# Altium PCB SHDN-BSPD-B01-V00.PcbDoc
Units mm, origin at the board's own origin, x right, y up, seen from the top; angles counter-clockwise.
Board outline 60 x 60 mm, 2 copper layers (Top Layer, Bottom Layer); 77 components, 36 nets, 230 pads, 46 vias.
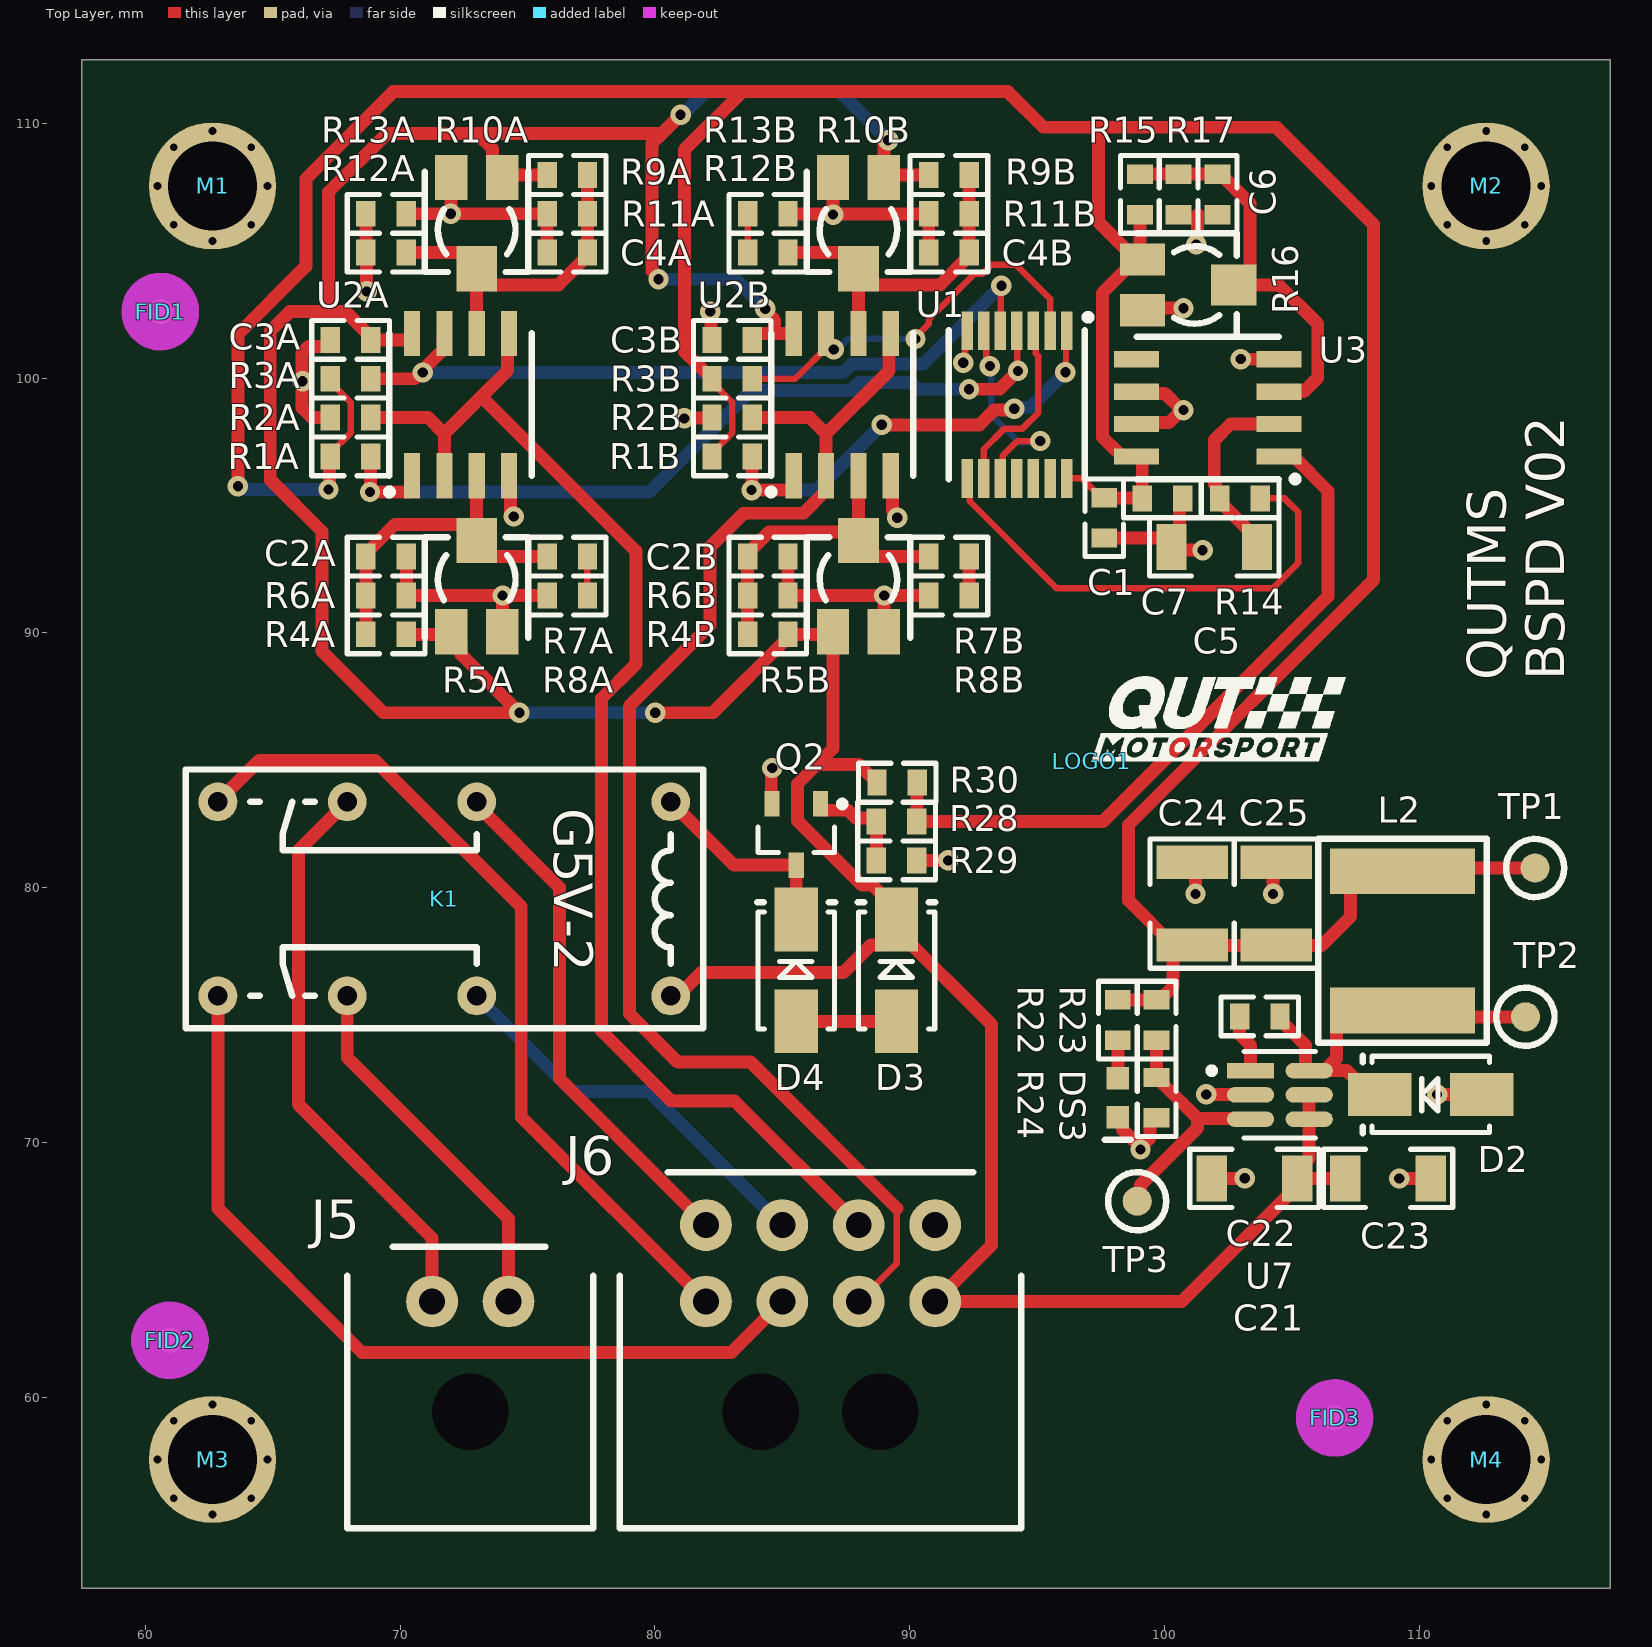
[diagram p0: Top Layer view]
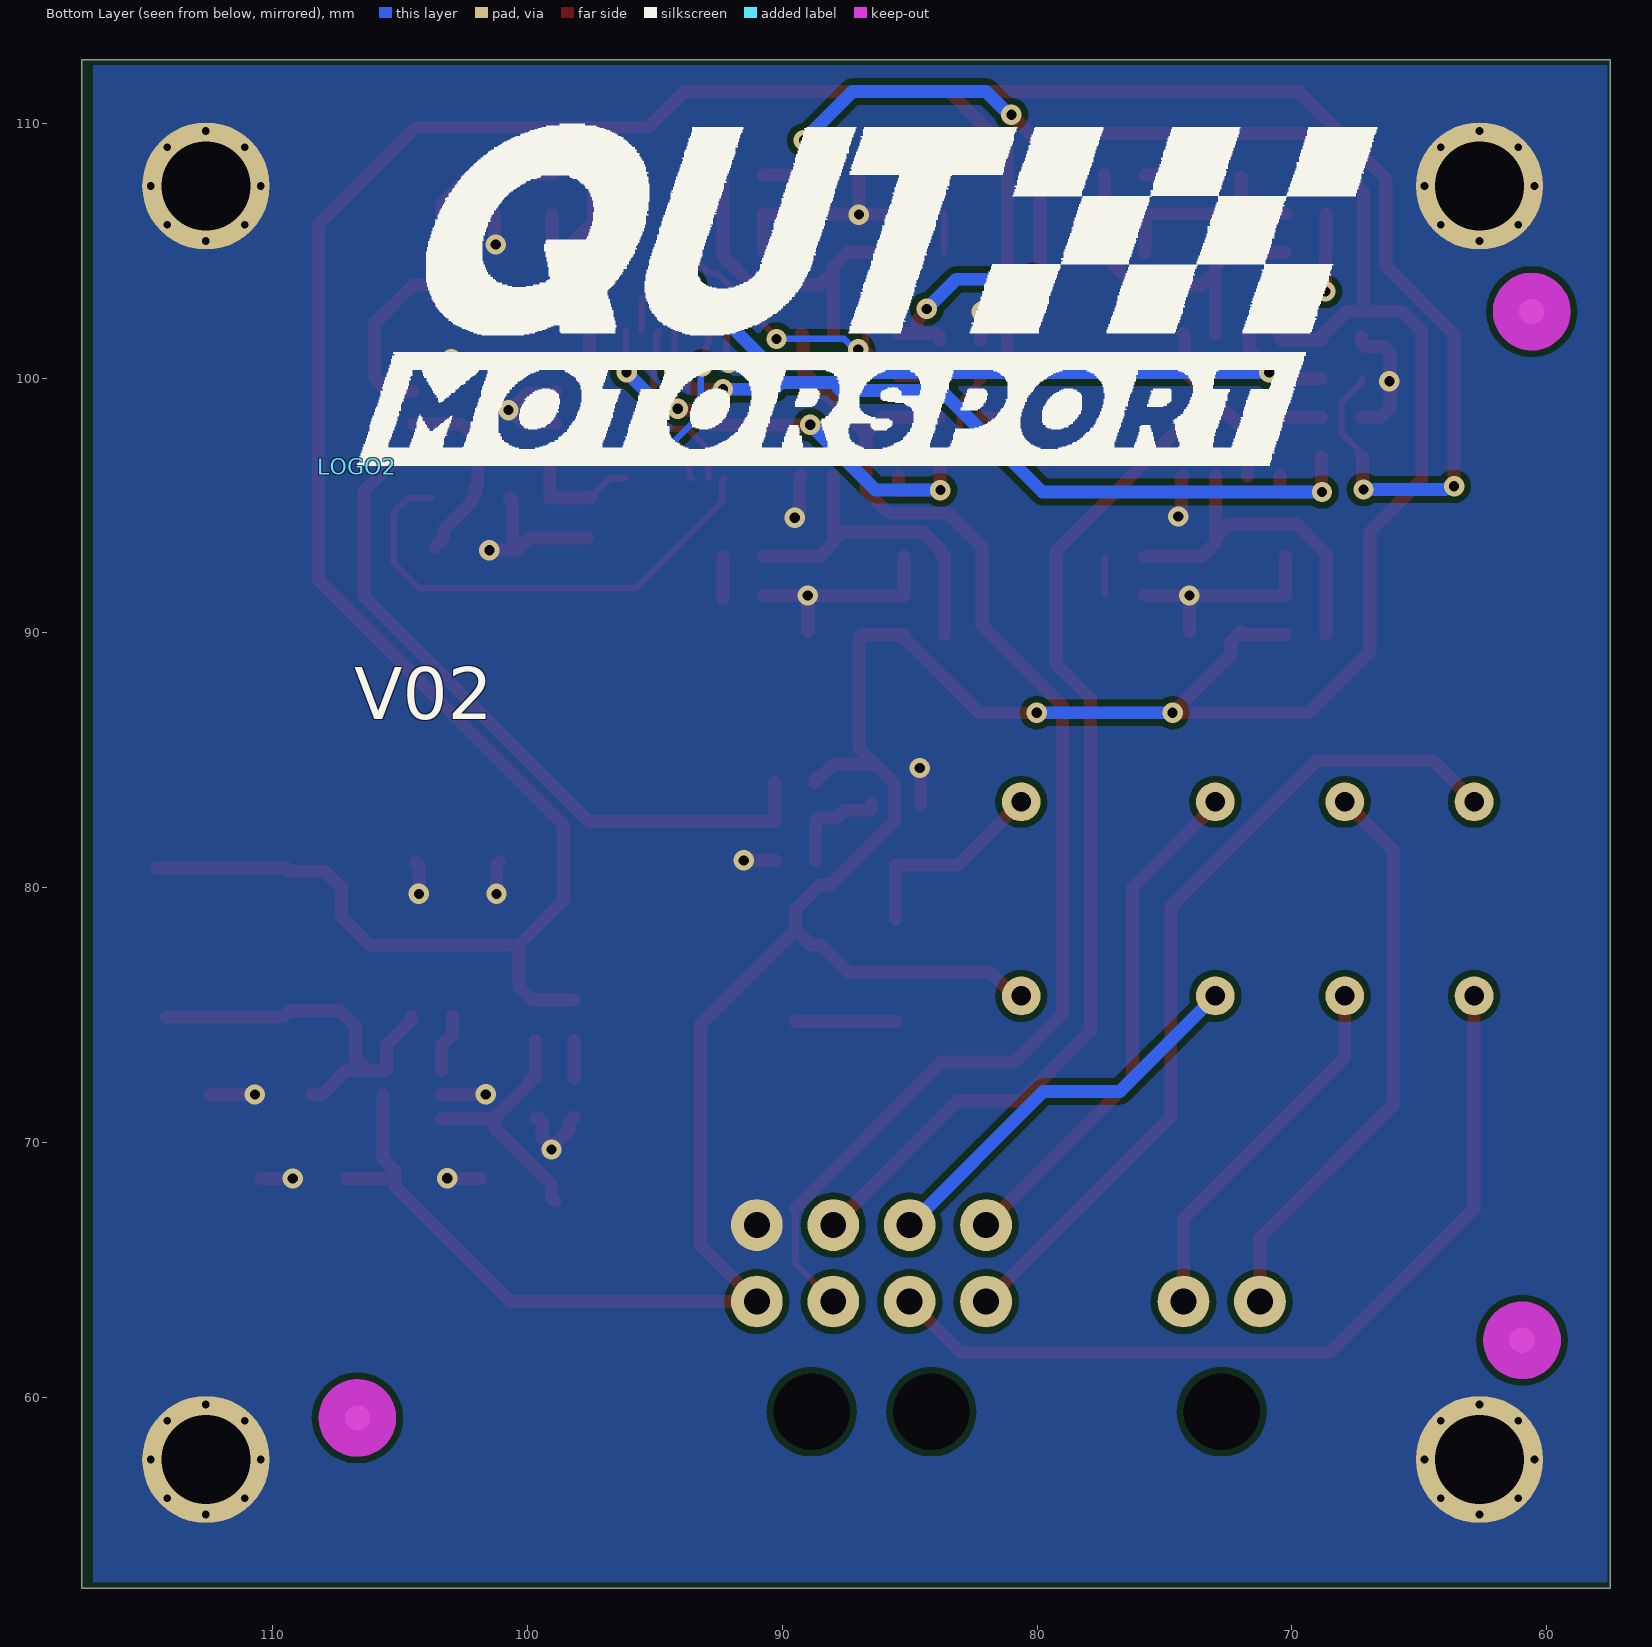
[diagram p1: Bottom Layer view, seen from below]
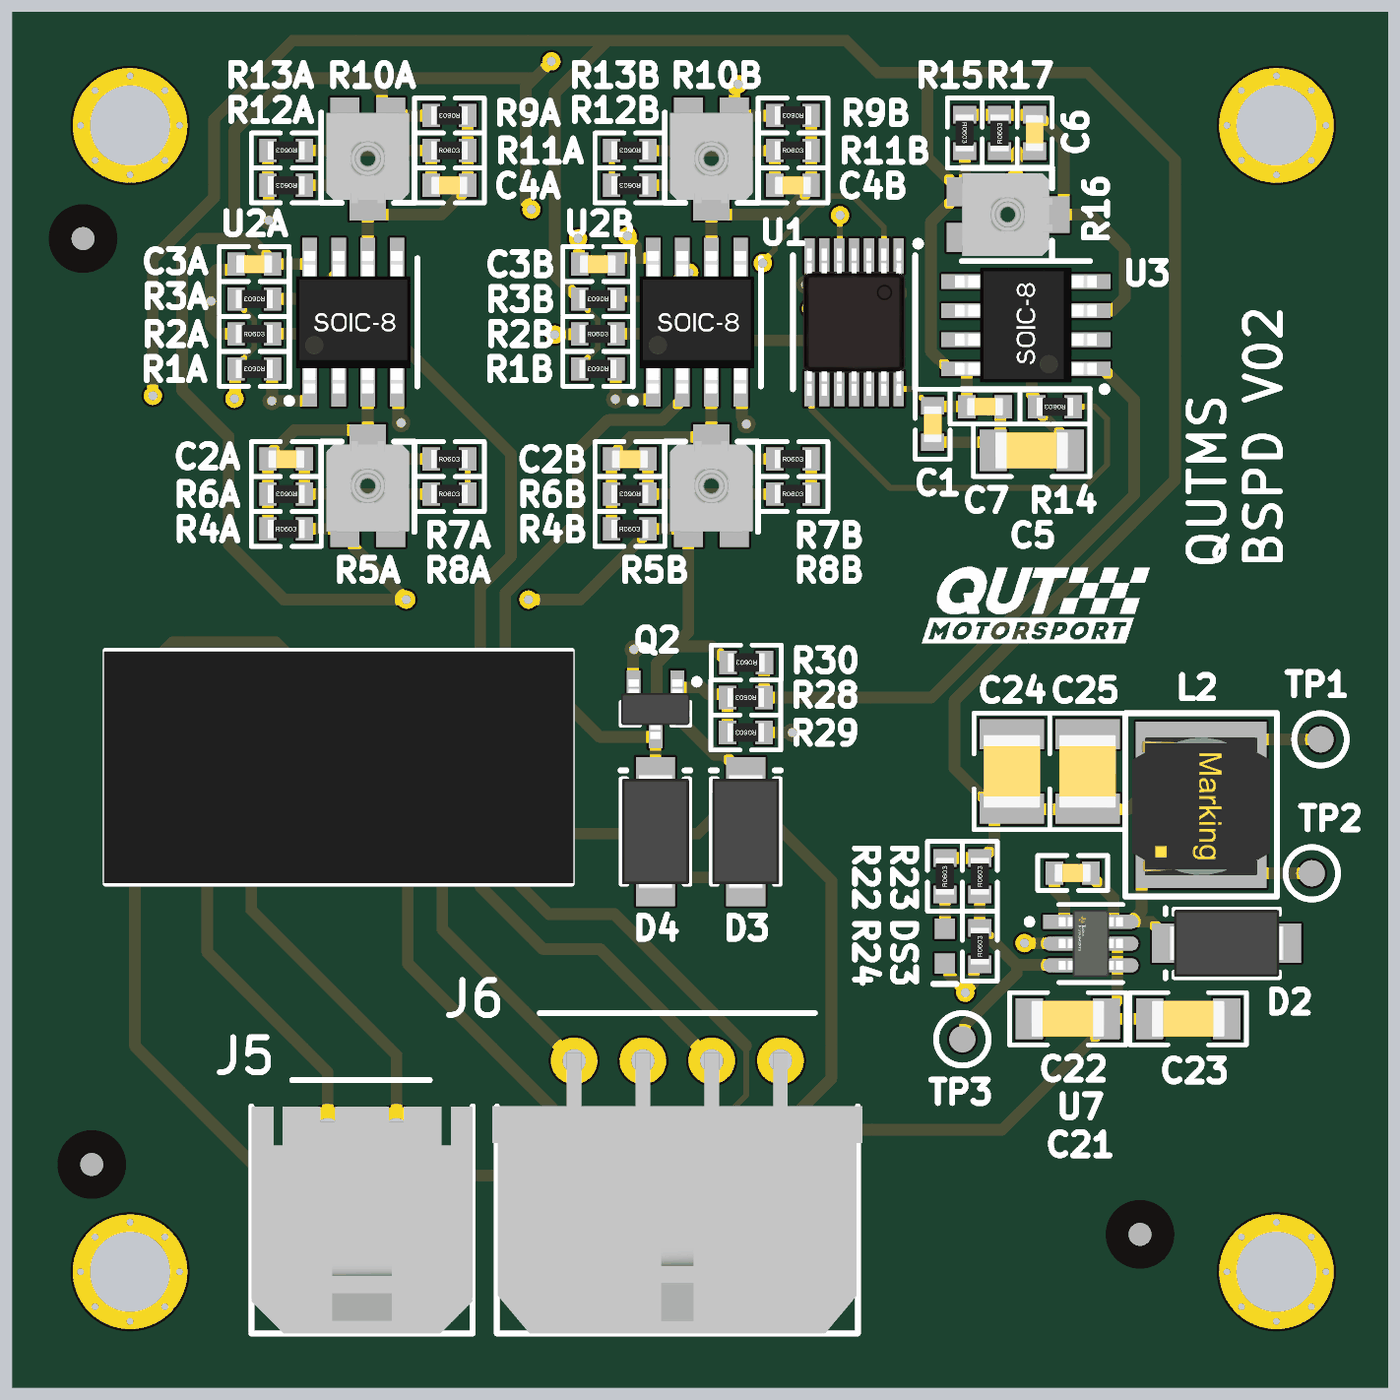
[diagram p2: 3D render of the assembled board from above, using the file's embedded part models]

## Layer stack, top to bottom
Top Solder: solder mask 0.0102, Solder Resist, Dk 3.5
Top Layer: signal copper 0.0356
Dielectric 1: dielectric 0.32, FR-4, Dk 4.8
Bottom Layer: signal copper 0.0356
Bottom Solder: solder mask 0.0102, Solder Resist, Dk 3.5

## Board outline
57.5,112.5 117.5,112.5 117.5,52.5 57.5,52.5

## Design rules (kind name [scope] priority, off if disabled: settings)
Clearance [All] p1: gap=0.254 ignorepadtopadclearanceinfootprint=FALSE except(0: Arc-Hole Track-Hole SMDPad-SMDPad SMDPad-Hole THPad-Hole Via-Hole Fill-Hole Poly-Hole Region-Hole Text-Hole; 0.203: Arc-Arc Arc-Track Arc-SMDPad Track-Track Track-SMDPad Fill-Fill Fill-Poly Fill-Region Poly-Poly Poly-Region Region-Region)
HoleSize [All] p1: absolutevalues=TRUE maxlimit=5.08 minlimit=0.025 maxpercent=80.000 minpercent=20.000
MinimumSolderMaskSliver [All] p1: minsoldermaskwidth=0.178
PolygonConnect [All] p1: connectstyle=Direct reliefconductorwidth=0.254 reliefentries=4 polygonreliefangle="90 Angle" airgapwidth=0.254
RoutingVias [All] p1: holewidth=0.4 width=0.8 viastyle="Through Hole" minholewidth=0.4 minwidth=0.8 maxholewidth=0.6 maxwidth=1.27
SilkToSilkClearance [All] p1: silktosilkclearance=0.127
SilkToSolderMaskClearance [IsPad] p1: minsilkscreentomaskgap=0.127 clearancetoexposedcopper=TRUE
SolderMaskExpansion [All] p1: expansion=0.102 istentingtop=FALSE
Width [All] p1: maxlimit=0.508 minlimit=0.254 preferedwidth=0.508 minimp=50.000000 maximp=50.000000 favimp=50.000000
26 further rules are at their usual default settings.

## Classes and differential pairs
component class SHDN-BSPD-S01-V00-BSPDBoard: FID1 FID2 FID3 LOGO1 LOGO2 M1 M2 M3 M4
channel class SHDN-BSPD-S03-V00-BSPDWindowComparitor: SHDN-BSPD-S03-V00-BSPDWindowComparitor1 SHDN-BSPD-S03-V00-BSPDWindowComparitor2
net class BSPD[1..11]: BSPD1 BSPD2 BSPD3 BSPD4 BSPD5 BSPD6 BSPD7 BSPD8 BSPD9 BSPD10 BSPD11
component class SHDN-BSPD-S10-V00-Connectivity: J5 J6
component class SHDN-BSPD-S09-V00-ShutdownRelay: D3 D4 K1 Q2 R28 R29 R30
component class SHDN-BSPD-S07-V00-PSU: C21 C22 C23 C24 C25 D2 DS3 L2 R22 R23 R24 TP1 TP2 TP3 U7
component class SHDN-BSPD-S04-V00-BSPDDelay: C5 C6 C7 R14 R15 R16 R17 U3
component class SHDN-BSPD-S03-V00-BSPDWindowComparitor2: C2B C3B C4B R1B R2B R3B R4B R5B R6B R7B R8B R9B R10B R11B R12B R13B U2B
component class SHDN-BSPD-S03-V00-BSPDWindowComparitor1: C2A C3A C4A R1A R2A R3A R4A R5A R6A R7A R8A R9A R10A R11A R12A R13A U2A
component class SHDN-BSPD-S02-V00-BSPDSystem: C1 U1

## Components (designator, comment, footprint, x,y, rotation, side; value= is the part's Value field where it differs from the comment)
C1 "100nF 50V 5% X7R 0603" Cap_Ceramic_0603 97.639,94.52 r90 top
C2A "100nF 50V 5% X7R 0603" Cap_Ceramic_0603 69.445,92.996 r180 top (schematic designator C2)
C2B "100nF 50V 5% X7R 0603" Cap_Ceramic_0603 84.431,92.996 r180 top (schematic designator C2)
C3A "100nF 50V 5% X7R 0603" Cap_Ceramic_0603 68.048,101.505 r180 top (schematic designator C3)
C3B "100nF 50V 5% X7R 0603" Cap_Ceramic_0603 83.034,101.505 r180 top (schematic designator C3)
C4A "100nF 50V 5% X7R 0603" Cap_Ceramic_0603 76.557,104.934 r0 top (schematic designator C4)
C4B "100nF 50V 5% X7R 0603" Cap_Ceramic_0603 91.543,104.934 r0 top (schematic designator C4)
C5 "10uF 25V 10% X7R 1206" Cap_Ceramic_1206 101.957,93.377 r0 top
C6 "100nF 50V 5% X7R 0603" Cap_Ceramic_0603 102.084,107.22 r90 top
C7 "100nF 50V 5% X7R 0603" Cap_Ceramic_0603 99.925,95.282 r180 top
C21 "100nF 100V 5% X7R 0603" Cap_Ceramic_0603 103.746,74.945 r0 top
C22 "22uF 35V 10% X7R 1206" Cap_Ceramic_1206 103.534,68.587 r0 top
C23 "22uF 35V 10% X7R 1206" Cap_Ceramic_1206 108.784,68.587 r180 top
C24 "47uF 16V 10% X7R 1210" Cap_Ceramic_1210 101.092,79.375 r270 top
C25 "47uF 16V 10% X7R 1210" Cap_Ceramic_1210 104.394,79.375 r270 top
D2 "B260A-13-F" SMA 110.458,71.882 r180 top
D3 "B260A-13-F" SMA 89.485,76.752 r90 top
D4 "SMAZ6V2-13-F" SMA 85.548,76.752 r90 top
DS3 "LED Green 0603" "LED GREEN 0603" 98.171,71.755 r270 top
FID1 "Fiducial 1MM" "FIDUCIAL 1MM" 60.579,102.616 r0 top
FID2 "Fiducial 1MM" "FIDUCIAL 1MM" 60.96,62.23 r0 top
FID3 "Fiducial 1MM" "FIDUCIAL 1MM" 106.68,59.182 r0 top
J5 "Microfit 3.0 1x2" Microfit_1X2_R_TH 72.75,59.432 r0 top
J6 "Microfit 3.0 2x4" Microfit_2X4_R_TH 86.5,59.432 r0 top
K1 "G5V-2-DC12" G5V-2 71.73,79.56 r180 top
L2 "74404064221" Inductor_6x6mm 109.347,77.851 r90 top
LOGO1 "10mm Wide QUTMS Logo" "QUTMS LOGO 10MM" 97.155,84.963 r0 top
LOGO2 "40mm Wide QUTMS Logo" "QUTMS LOGO 40MM" 106.68,96.52 r180 bottom
M1 "Hole M3 Loose Plated" "M3.5 PLATED" 62.63,107.55 r0 top
M2 "Hole M3 Loose Plated" "M3.5 PLATED" 112.63,107.55 r0 top
M3 "Hole M3 Loose Plated" "M3.5 PLATED" 62.63,57.55 r0 top
M4 "Hole M3 Loose Plated" "M3.5 PLATED" 112.63,57.55 r0 top
Q2 "2N7002" SOT23-3 85.548,82.086 r270 top
R1A "1k 5% 0603" Res_ThinFilm_0603 68.048,96.933 r180 top (schematic designator R1)
R1B "1k 5% 0603" Res_ThinFilm_0603 83.034,96.933 r180 top (schematic designator R1)
R2A "1k 5% 0603" Res_ThinFilm_0603 68.048,98.457 r0 top (schematic designator R2)
R2B "1k 5% 0603" Res_ThinFilm_0603 83.034,98.457 r0 top (schematic designator R2)
R3A "1k 5% 0603" Res_ThinFilm_0603 68.048,99.981 r180 top (schematic designator R3)
R3B "1k 5% 0603" Res_ThinFilm_0603 83.034,99.981 r180 top (schematic designator R3)
R4A "DNF 0603" Res_ThinFilm_0603 69.445,89.948 r0 top (schematic designator R4)
R4B "DNF 0603" Res_ThinFilm_0603 84.431,89.948 r0 top (schematic designator R4)
R5A "TC33X-2-103E" TC33 73.001,92.107 r0 top (schematic designator R5)
R5B "TC33X-2-103E" TC33 87.987,92.107 r0 top (schematic designator R5)
R6A "DNF 0603" Res_ThinFilm_0603 69.445,91.472 r180 top (schematic designator R6)
R6B "DNF 0603" Res_ThinFilm_0603 84.431,91.472 r180 top (schematic designator R6)
R7A "10k 5% 0603" Res_ThinFilm_0603 76.557,92.996 r0 top (schematic designator R7)
R7B "10k 5% 0603" Res_ThinFilm_0603 91.543,92.996 r0 top (schematic designator R7)
R8A "2k7 5% 0603" Res_ThinFilm_0603 76.557,91.472 r0 top (schematic designator R8)
R8B "2k7 5% 0603" Res_ThinFilm_0603 91.543,91.472 r0 top (schematic designator R8)
R9A "DNF 0603" Res_ThinFilm_0603 76.557,107.982 r180 top (schematic designator R9)
R9B "DNF 0603" Res_ThinFilm_0603 91.543,107.982 r180 top (schematic designator R9)
R10A "TC33X-2-103E" TC33 73.001,105.823 r180 top (schematic designator R10)
R10B "TC33X-2-103E" TC33 87.987,105.823 r180 top (schematic designator R10)
R11A "DNF 0603" Res_ThinFilm_0603 76.557,106.458 r0 top (schematic designator R11)
R11B "DNF 0603" Res_ThinFilm_0603 91.543,106.458 r0 top (schematic designator R11)
R12A "10k 5% 0603" Res_ThinFilm_0603 69.445,104.934 r180 top (schematic designator R12)
R12B "10k 5% 0603" Res_ThinFilm_0603 84.431,104.934 r180 top (schematic designator R12)
R13A "2k7 5% 0603" Res_ThinFilm_0603 69.445,106.458 r180 top (schematic designator R13)
R13B "2k7 5% 0603" Res_ThinFilm_0603 84.431,106.458 r180 top (schematic designator R13)
R14 "68k 5% 0603" Res_ThinFilm_0603 102.973,95.282 r180 top
R15 "DNF 0603" Res_ThinFilm_0603 99.036,107.22 r270 top
R16 "TC33X-2-103E" TC33 101.195,103.664 r270 top
R17 "DNF 0603" Res_ThinFilm_0603 100.56,107.22 r90 top
R22 "64k9 1% 0603" Res_ThinFilm_0603 99.695,74.803 r90 top
R23 "1k 5% 0603" Res_ThinFilm_0603 98.171,74.803 r90 top
R24 "19k6 1% 0603" Res_ThinFilm_0603 99.695,71.755 r90 top
R28 "100R 5% 0603" Res_ThinFilm_0603 89.485,82.594 r180 top
R29 "1k 5% 0603" Res_ThinFilm_0603 89.485,81.07 r180 top
R30 "750R 5% 0603" Res_ThinFilm_0603 89.511,84.124 r180 top
TP1 "TestPoint_SMD" TestPointSMD 114.554,80.772 r180 top
TP2 "TestPoint_SMD" TestPointSMD 114.173,74.93 r90 top
TP3 "TestPoint_SMD" TestPointSMD 98.933,67.691 r90 top
U1 "SN74HC08" TSSOP-14 94.21,98.965 r270 top
U2A "LM393 SOIC-8" SOIC-8 72.366,98.965 r90 top (schematic designator U2)
U2B "LM393 SOIC-8" SOIC-8 87.352,98.965 r90 top (schematic designator U2)
U3 "LM393" SOIC-8 101.703,98.838 r180 top
U7 "LMR14010" LMR14010 104.521,71.882 r0 top

## Footprints (in the part's own frame and the unit in brackets; to place one, negate y for a bottom-side part, rotate by r counter-clockwise, add the part's x,y. Pads: shape width x height; smd on the part's side, far side on the other; paste and mask are expansions set on the pad)
Cap_Ceramic_0603 [mil]
  rect 30x40 smd: 1(-31.24,0) 2(31.24,0)
  silkscreen extent -60,-30 60,30, body extent -31,-16 32,16, height 33
Cap_Ceramic_1206 [mil]
  rect 47x71 smd: 1(-66.08,0) 2(66.08,0)
  silkscreen extent -100,-45 100,45, body extent -63,-31 63,32, height 53
Cap_Ceramic_1210 [mm]
  rect 1.3x2.8 smd: 1(-1.625,0) 2(1.625,0)
  silkscreen extent -2.54,-1.65 2.54,1.65, body extent -1.6,-1.25 1.6,1.25, height 1.35
"FIDUCIAL 1MM" [mm]
  round 1 smd mask+1: 1(0,0)
  round 1 smd far side mask+1: 1(0,0)
  Keep-Out Layer circle w1.524: c0,0 r0.762
G5V-2 [mil]
  round 60 hole 30: 1(-350,150) 4(-50,150) 6(150,150) 8(350,150) 9(350,-150) 11(150,-150) 13(-50,-150) 16(-350,-150)
  silkscreen extent -400,-200 400,200, body extent -404,-199 404,199, height 453
Inductor_6x6mm [mm]
  rect 1.8x5.7 smd: 1(-2.667,0) 2(2.794,0)
  silkscreen extent -3.94,-3.3 4.06,3.3, body extent -3,-3 3,3, height 4.56
"LED GREEN 0603" [mil]
  rect 35x35 smd: 1(-30,0) 2(30,0)
  silkscreen extent 65,-20 65,20, body extent -40,-20 40,20, height 30
LMR14010 [mm]
  rect 1.854x0.612 smd: 1(-1.136,0.933)
  rrect100% 1.854x0.612 smd: 2(-1.136,-0.017) 3(-1.136,-0.967) 4(1.164,-0.967) 5(1.164,-0.017) 6(1.164,0.933)
  silkscreen extent -2.79,-1.72 1.41,1.68, body extent -2.56,-1.97 2.59,1.93, height 0.25
"M3.5 PLATED" [mil]
  round 20 hole 11.81: 1(-85,0) 1(-60,-60) 1(-60,60) 1(0,-85) 1(0,85) 1(60,-60) 1(60,60) 1(85,0)
  round 196.85 hole 137.8: 1(0,0)
Microfit_1X2_R_TH [mil]
  round 80 hole 40: 1(59.06,170) 2(-59.06,170)
  round 0 hole 118.11 mask+10: NC(0,0)
  silkscreen extent -190,-180 190,255, body extent -190,-180 190,210, height 223
Microfit_2X4_R_TH [mil]
  round 80 hole 40: 1(177.17,170) 2(59.06,170) 3(-59.06,170) 4(-177.17,170) 5(177.17,288.19) 6(59.06,288.19) 7(-59.06,288.19) 8(-177.17,288.19)
  round 0 hole 118.11 mask+10: NC(-92.52,0) NC(92.52,0)
  silkscreen extent -310,-180 310,370, body extent -318,-180 318,302, height 350
"QUTMS LOGO 10MM" [mm]
  silkscreen extent 0,0 9.96,3.34
"QUTMS LOGO 40MM" [mm]
  silkscreen extent -0.01,0.05 40.04,13.47
Res_ThinFilm_0603 [mil]
  rect 30x40 smd: 1(-31.24,0) 2(31.24,0)
  silkscreen extent -60,-30 60,30, body extent -31,-16 32,16, height 18
SMA [mm]
  rect 2.5x1.7 smd: A(-2,0) K(2,0)
  silkscreen extent -2.3,-1.52 2.67,1.52, body extent -2.52,-1.46 2.52,1.46, height 2.4
SOIC-8 [mil]
  rect 70x25 smd: 1(-110,75) 2(-110,25) 3(-110,-25) 4(-110,-75) 5(110,-75) 6(110,-25) 7(110,25) 8(110,75)
  silkscreen extent -140,-110 110,115, body extent -122,-98 122,98, height 75
SOT23-3 [mm] "SOT23, 3-Leads, Body 2.90x2.45mm, Pitch 0.95mm, IPC Medium Density"
  rect 1x0.6 smd: D(1.2,0) G(-1.2,0.95) S(-1.2,-0.95)
  silkscreen extent -1.32,-1.5 0.7,1.93, body extent -1.3,-1.5 1.3,1.5, height 1.1
TC33 [mil] "3 mm SMD Trimpot® Trimming Potentiometer"
  rect 50x70 smd: 1(-39.37,-81) 3(39.37,-81)
  rect 63x70 smd: 2(0,60)
  silkscreen extent -80,-90 80,65, body extent -71,-90 71,66, height 46
TestPointSMD [mil]
  round 45 smd: 1(0,0)
  silkscreen extent -45,-45 45,45
TSSOP-14 [mm]
  rect 1.524x0.45 smd: 1(-2.9,1.95) 2(-2.9,1.3) 3(-2.9,0.65) 4(-2.9,0) 5(-2.9,-0.65) 6(-2.9,-1.3) 7(-2.9,-1.95) 8(2.9,-1.95) 9(2.9,-1.3) 10(2.9,-0.65) 11(2.9,0) 12(2.9,0.65) 13(2.9,1.3) 14(2.9,1.95)
  silkscreen extent -3.56,-2.67 2.92,2.92, body extent -3.21,-2.22 3.22,2.23, height 1.11

## Part data
C1 C2A C2B C3A C3B C4A C4B C6 C7: "Capacitor, Ceramic, SMD, 100nF, 50V, 5%, X7R, 0603"
C5: "Capacitor, Ceramic, SMD, 10uF, 25V, 10%, X7R, 1206"
C21: "Capacitor, Ceramic, SMD, 100nF, 100V, 5%, X7R, 0603"
C22 C23: "Capacitor, Ceramic, SMD, 22uF, 35V, 10%, X7R, 1206"
C24 C25: "Capacitor, Ceramic, SMD, 47uF, 16V, 5%, X7R, 1210"
D2 D3: "Diode, Schottky Barrier Rectifier, 60 V, 2 A, B260A-13-F"
D4: "Zener Diode 6.2V 1W ±5% Surface Mount SMA", Manufacturer=Generic, MPN="5V6 500mW SMA"
J5: library part Microfit_1x2
J6: library part Microfit_2x4
K1: "General Purpose Relay DPDT (2 Form C) Through Hole, 12V, 2A"
L2: "FIXED IND 220UH 660MA 850 MOHM", ComponentLink1Description=Digikey, ComponentLink1URL=https://www.digikey.com.au/product-detail/en/w%C3%BCrth-elektronik/74404064221/732-7261-1-ND/5353241, ComponentLink2Description="LCSC A", ComponentLink2URL=https://lcsc.com/product-detail/Power-Inductors_Sunlord-SWPA6045S221MT_C91047.html, ComponentLink3Description="LCSC B", ComponentLink3URL=https://lcsc.com/product-detail/Power-Inductors_SXN-Shun-Xiang-Nuo-Elec-SMNR6045-221MT_C467145.html
LOGO1: library part "QUTMS Logo 10mm"
LOGO2: library part "QUTMS Logo 40mm"
M1 M2 M3 M4: "M3.5 Hole, Plated"
R1A R1B R2A R2B R3A R3B R23 R29: "Resistor, SMD, 1k, 0.1W, 5%, 0603"
R4A R4B R6A R6B R9A R9B R11A R11B R15 R17: "Resistor, SMD, DNF, 0.1W, 0603"
R5A R5B R10A R10B R16: "10 kOhms 0.1W, 1/10W J Lead Surface Mount Trimmer Potentiometer Cermet 1 Turn Top Adjustment"
R7A R7B R12A R12B: "Resistor, SMD, 10k, 0.1W, 5%, 0603"
R8A R8B R13A R13B: "Resistor, SMD, 2k7, 0.1W, 5%, 0603"
R14: "Resistor, SMD, 68k, 0.1W, 5%, 0603"
R22: "Resistor, SMD, 64k9, 0.1W, 5%, 0603"
R24: "Resistor, SMD, 19k6, 0.1W, 5%, 0603"
R28: library part "100R 5%, 0603", "Resistor, SMD, 100R, 0.1W, 5%, 0603"
R30: library part "820R 5% 0603", "Resistor, SMD, 750R, 0.1W, 5%, 0603"
U1: "Quadruple 2-Input Positive-AND Gates"
U2A U2B: library part LM393, "General Purpose Comparitor 2 Circuit 8-SOIC"
U3: "General Purpose Comparitor 2 Circuit 8-SOIC"

## Via types
v1: diameter 0.8, hole 0.4, Top Layer to Bottom Layer, 28 vias
v2: diameter 0.8, hole 0.4, Top Layer to Bottom Layer, tented both sides, 18 vias

## Nets (pads, with @x,y where several pads share a name; then routed paths per layer and width w, separated by ;. In a path a pad name is that pad's centre, name@x,y a point inside that pad or via, vN(x,y) a via of type N, cw(c..) or ccw(c..) an arc to the next point about the centre after c; other vN are vias at no path point)
3V3: C1.2 C7.2 C24.2 C25.2 L2.2 R1A.2 R1B.2 R3A.2 R3B.2 R15.2 R16.1 R22.2 R23.2 TP1.1 U1.14 U3.8 | length 159.2
  Top Layer w0.254: R1A.2 67.255,97.06 68.048,97.853 68.048,99.061 67.255,99.854 R3A.2 ; R1B.2 82.241,97.06 83.034,97.853 83.034,99.061 82.241,99.854 R3B.2 ; U1.14 96.766,96.065 97.258,95.573 97.258,95.567 C1.2@97.512,95.313
  Top Layer w0.508: v1(63.627,95.758) 63.627,101.727 66.294,104.394 66.294,107.823 69.723,111.252 83.439,111.252 ; v1(67.183,95.631) 67.219,95.667 67.219,96.897 R1A.2 ; R1B.2@82.114,96.806 R1B.2 ; R3B.2 82.241,100.108 82.114,100.235 81.987,100.235 81.682,100.54 81.67,100.54 81.153,101.057 81.153,108.966 83.439,111.252 ; C1.2@97.512,95.313 C1.2 97.655,95.298 99.116,95.298 C7.2 99.132,96.869 99.068,96.933 U3.8 98.337,96.933 97.915,97.356 97.903,97.356 97.563,97.696 97.563,103.343 98.985,104.766 99.036,104.766 R16.1@99.036,105.029 ; R23.2 R22.2 99.822,75.596 100.33,76.104 C24.2@100.33,77.75 ; R15.2 R16.1@99.036,105.029 ; TP1.1 109.474,80.772 L2.2 107.961,80.645 107.315,79.999 107.315,78.867 106.172,77.724 104.394,77.724 101.118,77.724 C24.2 100.342,77.75 98.59,79.502 98.59,82.461 108.204,92.075 108.204,106.045 104.394,109.855 97.707,109.855 ; 83.439,111.252 93.853,111.252 95.25,109.855 97.707,109.855 ; 97.707,109.855 97.409,109.557 97.409,106.139 98.519,105.029 R16.1@99.036,105.029
  Bottom Layer w0.508: v1(63.627,95.758) 63.683,95.702 63.889,95.702 63.96,95.631 v1(67.183,95.631)
"5KW SIGNAL IN": J6.6 R2A.2 U2A.2 U2A.5 | length 51.1
  Top Layer w0.508: R2A.2 71.096,98.457 71.731,97.822 ; U2A.2 71.731,97.822 ; U2A.5 74.207,101.695 74.207,100.298 73.124,99.215 ; J6.6 83.124,71.628 80.645,71.628 77.902,74.371 77.902,87.427 79.248,88.773 79.248,93.218 73.251,99.215 73.124,99.215 ; 71.731,97.822 73.124,99.215
12V: C3A.1 C3B.1 C22.2 C23.2 D3.K J6.1 K1.1 R4A.2 R4B.2 R5A.1 R5B.1 R9A.2 R9B.2 R10A.1 R10B.1 R30.2 U2A.8 U2B.8 U7.4 U7.5 | length 163.9
  Top Layer w0.508: R4A.2 71.899,89.948 R5A.1 72.382,89.669 72.382,89.162 v1(74.676,86.868) 69.342,86.868 66.929,89.281 66.929,93.98 64.897,96.012 64.897,101.854 65.659,102.616 67.183,102.616 ; U2A.8 70.461,101.568 70.397,101.505 C3A.1 68.841,101.632 67.857,102.616 67.183,102.616 ; R9A.2 74.103,107.982 R10A.1 73.62,108.261 73.62,109.006 73.025,109.601 ; v1(80.01,86.868) 82.271,86.868 85.224,89.821 R4B.2 86.885,89.948 86.987,89.846 86.987,85.463 86.36,84.836 ; v1(80.137,103.886) 80.137,103.965 79.883,104.219 79.883,109.22 80.264,109.601 ; K1.1 80.895,75.75 81.808,76.663 87.396,76.663 88.489,77.756 88.889,77.756 D3.K@89.485,78.352 ; v1(81.007,110.344) 80.264,109.601 ; C3B.1 83.827,101.632 83.954,101.759 84.701,101.759 ; v1(84.328,102.724) 84.328,102.645 84.701,102.272 84.701,101.759 ; U2B.8 84.701,101.759 ; R30.2 88.718,84.251 88.591,84.378 88.464,84.378 88.006,84.836 86.36,84.836 ; v1(89.154,109.347) 88.987,109.18 R10B.1 89.089,107.982 R9B.2 ; U7.5 U7.4 105.685,69.365 105.212,68.892 C22.2 ; C23.2 C22.2 ; 67.183,102.616 67.183,107.315 69.469,109.601 73.025,109.601 ; 73.025,109.601 74.549,109.601 80.264,109.601 ; 86.36,84.836 85.598,84.074 85.598,82.628 88.121,80.105 88.532,80.105 89.485,79.152 D3.K D3.K@89.485,78.352 ; D3.K@89.485,78.352 93.218,74.619 93.218,65.968 J6.1 100.68,63.75 105.212,68.282 C22.2
  Bottom Layer w0.508: v1(74.676,86.868) v1(80.01,86.868) ; v1(80.137,103.886) 83.166,103.886 v1(84.328,102.724) ; v1(81.007,110.344) 81.086,110.344 81.994,111.252 87.249,111.252 v1(89.154,109.347)
BSPD1: R1B.1 U1.1 U2B.1 | length 19.5
  Top Layer w0.254: v2(96.115,100.235) 96.138,100.258 96.138,101.843 U1.1
  Top Layer w0.508: v2(83.796,95.607) 85.439,95.607 85.447,95.599 U2B.1 ; v2@83.812,95.552 83.812,96.917 R1B.1 ; v1(88.9,98.171) 92.739,98.171 93.319,98.75 94.051,98.75 v1(94.107,98.806)
  Bottom Layer w0.508: v2(83.796,95.607) 86.336,95.607 v1(88.9,98.171) ; v1(94.107,98.806) 94.163,98.862 94.742,98.862 v2(96.115,100.235)
BSPD2: R3B.1 U1.2 U2B.7 | length 16.1
  Top Layer w0.254: R3B.1 85.51,99.981 85.606,100.076 U2B.7@86.717,101.187 ; U2B.7 U2B.7@86.717,101.187 ; v1(87.015,101.132) 86.96,101.187 U2B.7@86.717,101.187 ; v1(90.229,101.542) 90.229,101.606 90.749,102.126 90.749,102.306 92.539,104.096 92.854,104.096 93.223,104.465 94.163,104.465 95.51,103.118 U1.2
  Bottom Layer w0.254: v1(87.015,101.132) 87.163,101.132 87.573,101.542 v1(90.229,101.542)
BSPD3: R7B.2 R8B.2 | length 1.7
  Top Layer w0.508: R8B.2@92.336,91.345 R8B.2 R7B.2
BSPD4: R12B.2 R13B.2 | length 1.5
  Top Layer w0.254: R12B.2 R13B.2
BSPD5: R1A.1 U1.4 U2A.1 | length 32.9
  Top Layer w0.254: U1.4 94.231,101.844 94.231,100.309 v1(94.252,100.288)
  Top Layer w0.508: R1A.1 68.826,96.917 68.826,95.552 v2(68.81,95.536) 70.397,95.536 70.461,95.599 U2A.1 ; v1(92.329,99.568) 93.525,99.568 94.245,100.288 v1(94.252,100.288)
  Bottom Layer w0.508: v2(68.81,95.536) 79.788,95.536 83.765,99.513 87.686,99.513 88.014,99.841 90.035,99.841 90.308,99.568 v1(92.329,99.568)
BSPD6: R3A.1 U1.5 U2A.7 | length 29.9
  Top Layer w0.254: U1.5 93.58,101.885 93.58,103.613 v1(93.599,103.632)
  Top Layer w0.508: R3A.1 70.561,99.981 70.804,100.224 v1(70.883,100.224) ; v1@70.831,100.276 71.667,101.112 71.667,101.695 U2A.7
  Bottom Layer w0.508: v1(70.883,100.224) 87.392,100.224 87.719,100.552 90.523,100.552 93.599,103.628 v1(93.599,103.632)
BSPD7: R7A.2 R8A.2 | length 1.5
  Top Layer w0.254: R8A.2 R7A.2
BSPD8: R12A.2 R13A.2 | length 3.1
  Top Layer w0.508: R13A.2 R12A.2 68.667,104.918 68.667,103.426 v2(68.683,103.41)
BSPD9: R14.1 U1.8 | length 19.4
  Top Layer w0.254: U1.8 92.355,95.97 92.355,95.166 95.771,91.75 104.25,91.75 105.25,92.75 105.25,94.75 104.718,95.282 R14.1
BSPD10: R28.1 R30.1 U3.1 | length 28
  Top Layer w0.508: R30.1 90.291,84.111 90.291,82.607 R28.1 97.58,82.594 106.426,91.44 106.426,95.575 105.068,96.933 U3.1
BSPD11: C6.2 R15.1 R16.2 R17.2 U3.3 | length 16
  Top Layer w0.508: R15.1@99.02,107.998 R15.1 R17.2 C6.2 102.211,108.013 103.354,106.87 103.354,104.21 R16.2@102.808,103.664 ; R16.2 R16.2@102.808,103.664 ; U3.3 105.469,99.473 106.021,100.025 106.021,102.14 104.497,103.664 R16.2@102.808,103.664
"CHAIN IN": J6.7 K1.4 | length 15.7
  Bottom Layer w0.508: K1.4 76.75,72 79.752,72 J6.7
"CHAIN LED": J5.1 K1.6 | length 14.6
  Top Layer w0.508: K1.6 67.92,73.33 74.25,67 J5.1
"CHAIN OUT": J6.3 K1.8 | length 33.7
  Top Layer w0.508: K1.8 62.84,67.41 68.5,61.75 83,61.75 J6.3
"COMP BTMA": C4A.2 R9A.1 R10A.2 R11A.2 R12A.1 U2A.6 | length 13.8
  Top Layer w0.508: R12A.1 72.455,104.934 73.001,104.388 R10A.2 R10A.2@73.001,104.21 ; U2A.6 R10A.2@73.001,104.21 ; R9A.1 R11A.2 C4A.2 77.35,104.807 76.207,103.664 73.547,103.664 R10A.2@73.001,104.21
"COMP BTMB": C4B.2 R9B.1 R10B.2 R11B.2 R12B.1 U2B.6 | length 13.8
  Top Layer w0.508: R12B.1 87.441,104.934 87.987,104.388 R10B.2 R10B.2@87.987,104.21 ; U2B.6 R10B.2@87.987,104.21 ; R9B.1 R11B.2 C4B.2 92.336,104.807 91.193,103.664 88.533,103.664 R10B.2@87.987,104.21
"COMP TOPA": C2A.2 R4A.1 R5A.2 R6A.2 R7A.1 U2A.3 | length 13.8
  Top Layer w0.508: R4A.1 R6A.2 C2A.2 68.652,93.123 69.795,94.266 72.455,94.266 R5A.2@73.001,93.72 ; U2A.3 R5A.2@73.001,93.72 ; R7A.1 73.547,92.996 73.001,93.542 R5A.2 R5A.2@73.001,93.72
"COMP TOPB": C2B.2 R4B.1 R5B.2 R6B.2 R7B.1 U2B.3 | length 13.5
  Top Layer w0.508: R4B.1 R6B.2 C2B.2 83.765,93.123 83.765,93.25 84.483,93.968 87.65,93.968 R5B.2 87.987,93.72 U2B.3 ; R5B.2@87.987,93.542 88.533,92.996 R7B.1
"DET LED": J5.2 K1.11 | length 22.6
  Top Layer w0.508: K1.11 66,81.45 66,71.5 71.25,66.25 J5.2
"DETECTION IN": J6.8 K1.13 | length 20.3
  Top Layer w0.508: K1.13 73,83.25 76.25,80 76.25,72.506 82,66.756 J6.8
"DETECTION OUT": J6.4 K1.9 | length 33.5
  Top Layer w0.508: K1.9 64.47,85 69,85 74.75,79.25 74.75,71 J6.4
GND: C1.1 C2A.1 C2B.1 C3A.2 C3B.2 C4A.1 C4B.1 C5.1 C6.1 C7.1 C22.1 C23.1 C24.1 C25.1 D2.A DS3.2 J6.5 M1.1 M2.1 M3.1 M4.1 Q2.S R2A.1 R2B.1 R5A.3 R5B.3 R6A.1 R6B.1 R8A.1 R8B.1 R10A.3 R10B.3 R11A.1 R11B.1 R13A.1 R13B.1 R16.3 R17.1 R24.1 R29.1 U1.7 U2A.4 U2B.4 U3.4 U3.6 U3.7 U7.2 | length 75
  Top Layer w0.254: v2(92.103,100.608) 92.182,100.686 92.182,101.787 U1.7
  Top Layer w0.508: R2A.1 66.524,98.457 66.143,98.838 66.143,100.997 66.397,101.251 67.128,101.251 67.255,101.378 C3A.2 C3A.2@67.255,101.632 ; C2A.1 R6A.1 v2(74.017,91.472) ; R13A.1 v2(71.985,106.458) ; R10A.3 71.993,107.872 71.993,106.466 v2(71.985,106.458) ; R5A.3 74.009,90.058 74.009,91.464 v2(74.017,91.472) ; U2A.4 74.334,96.107 74.334,94.772 74.453,94.654 v2(74.453,94.575) ; R8A.1 v2(74.017,91.472) ; C4A.1 R11A.1 v2(71.985,106.458) ; v1(81.153,98.425) 81.169,98.441 82.225,98.441 R2B.1 ; v1(82.169,102.616) 82.205,102.58 82.205,101.541 C3B.2 ; Q2.S 84.565,83.319 84.565,84.593 84.603,84.631 v2(84.603,84.697) ; C2B.1 R6B.1 v2(89.003,91.472) ; R13B.1 85.24,106.442 86.979,106.442 v2(86.995,106.426) ; R10B.3 86.991,107.876 86.991,106.43 v2(86.995,106.426) ; R5B.3 88.995,90.058 88.995,91.464 v2(89.003,91.472) ; U2B.4 89.32,96.107 89.32,94.79 89.511,94.599 v2(89.511,94.52) ; R29.1 v2(91.517,81.07) ; R8B.1 v2(89.003,91.472) ; C4B.1 R11B.1 90.734,106.442 87.011,106.442 v2(86.995,106.426) ; C1.1 99.936,93.727 100.279,93.384 C5.1 ; DS3.2 98.361,70.802 98.361,70.501 v1@99.06,69.802 ; U3.7 98.972,98.266 100.187,98.266 v1@100.671,98.75 ; U3.6 98.972,99.409 100.011,99.409 v1@100.671,98.75 ; v1(99.06,69.723) v1@99.06,69.802 ; R16.3 99.224,102.75 v1(100.75,102.75) ; R24.1 99.568,70.962 99.441,70.835 99.441,70.183 v1@99.06,69.802 ; C7.1 100.591,95.155 100.591,93.69 C5.1 ; v1(100.75,98.75) v1@100.671,98.75 ; C24.1 101.219,80.873 v1(101.219,79.756) ; v1(101.25,105.25) 101.306,105.306 101.306,106.41 101.322,106.427 ; v2(101.5,93.25) 100.406,93.25 C5.1 ; v1(101.642,71.885) 101.652,71.875 103.375,71.875 U7.2 ; C22.1 103.147,68.587 v1(103.152,68.592) ; v1(103,100.75) 103.003,100.746 104.493,100.746 U3.4 ; v1(104.267,79.756) 104.267,80.873 C25.1 ; v1(109.22,68.58) 110.455,68.58 C23.1 ; v2(110.708,71.882) D2.A
  other v2: 66.167,99.885
NetC5_2: C5.2 R14.2 U3.2 | length 7.7
  Top Layer w0.508: C5.2 103.293,93.72 103.293,94.042 102.18,95.155 R14.2 102.053,95.409 102.053,95.738 101.957,95.834 101.957,97.568 102.592,98.203 U3.2
NetD3_A: D3.A D4.A | length 3.9
  Top Layer w0.508: D4.A D3.A
NetDS3_1: DS3.1 R23.1 | length 1.5
  Top Layer w0.508: DS3.1 R23.1
NetU1_3: U1.3 U1.9 | length 7.2
  Top Layer w0.254: U1.9 92.91,97.208 93.727,98.025 94.43,98.025 95.043,98.638 95.043,100.873 94.955,100.962 94.955,101.77 U1.3
NetU1_6: U1.6 U1.10 | length 8.4
  Top Layer w0.254: U1.6 92.91,101.325 93.005,101.23 93.005,100.768 93.149,100.624 v2(93.149,100.476) ; U1.10 93.655,96.16 93.655,96.964 94.215,97.524 95.111,97.524 v2(95.123,97.536)
  Bottom Layer w0.254: v2(93.149,100.476) 93.199,100.426 93.199,98.57 94.278,97.49 95.077,97.49 v2(95.123,97.536)
"PEDAL IN": J6.2 R2B.2 U2B.2 U2B.5 | length 53.4
  Top Layer w0.254: J6.2 89.5,65.25 89.5,67.407
  Top Layer w0.508: R2B.2 86.082,98.457 86.717,97.822 ; U2B.5 89.193,101.695 89.193,100.298 86.717,97.822 ; 89.5,67.407 83.755,73.152 80.899,73.152 78.994,75.057 78.994,87.136 82.169,90.311 82.169,93.387 83.482,94.699 85.829,94.699 86.222,95.093 86.222,95.104 86.717,95.599 U2B.2 86.717,97.822
"PWR CB": C21.1 U7.1 | length 2.3
  Top Layer w0.508: C21.1 102.952,74.233 103.385,73.8 U7.1
"PWR FB": R22.1 R24.2 TP3.1 U7.3 | length 10.1
  Top Layer w0.508: TP3.1 99.055,67.813 99.055,68.321 101.308,70.574 101.308,70.935 ; R22.1 R24.2 99.822,72.548 99.949,72.421 99.949,72.294 101.308,70.935 ; U7.3 103.365,70.935 101.308,70.935
"PWR SW": C21.2 D2.K L2.1 TP2.1 U7.6 | length 15.5
  Top Layer w0.508: C21.2@104.552,74.93 104.552,74.803 105.537,73.818 105.537,72.864 105.585,72.815 U7.6 U7.6@106.278,72.815 ; D2.K 108.058,71.882 107.462,72.478 107.462,72.518 107.164,72.815 U7.6@106.278,72.815 ; TP2.1 109.601,74.93 L2.1 107.397,75.184 106.751,74.538 106.751,73.288 U7.6@106.278,72.815
RELAY: D4.K K1.16 Q2.D | length 8.1
  Top Layer w0.508: K1.16 83.104,80.886 Q2.D D4.K
"RELAY CTRL": Q2.G R28.2 R29.2 | length 4.1
  Top Layer w0.508: Q2.G 86.498,83.086 86.544,83.04 87.575,83.04 87.881,82.734 88.565,82.734 88.692,82.607 R29.2
pads on no net: FID1.1 FID2.1 FID3.1 J5.NC J6.NC U1.11 U1.12 U1.13 U3.5

## Polygon pours and split planes (outlines as drawn)
GND on Bottom Layer "GND_L02_P000" (solid, pour order 0): 57.622,112.286 117.058,112.286 117.058,52.723 57.622,52.723

## Silkscreen, mask and mechanical layers (free items; w line width, h text height)
Top Overlay:
  text "QUTMS / BSPD V02" at 115.697,88.138 h1.52 r90
Bottom Overlay:
  text "QUTMS - BRAKE SYSTEM PLAUSABILITY DEVICE / V02" at 106.807,86.614 h2.03
Mechanical 1:
  the board outline again, w0.254

## Text inside footprints (layer, text, board x,y; h text height)
K1: Top Overlay "G5V-2" at 76.048,83.115 h1.52 r270